# EAGLE board panel (EAGLE 6.3)
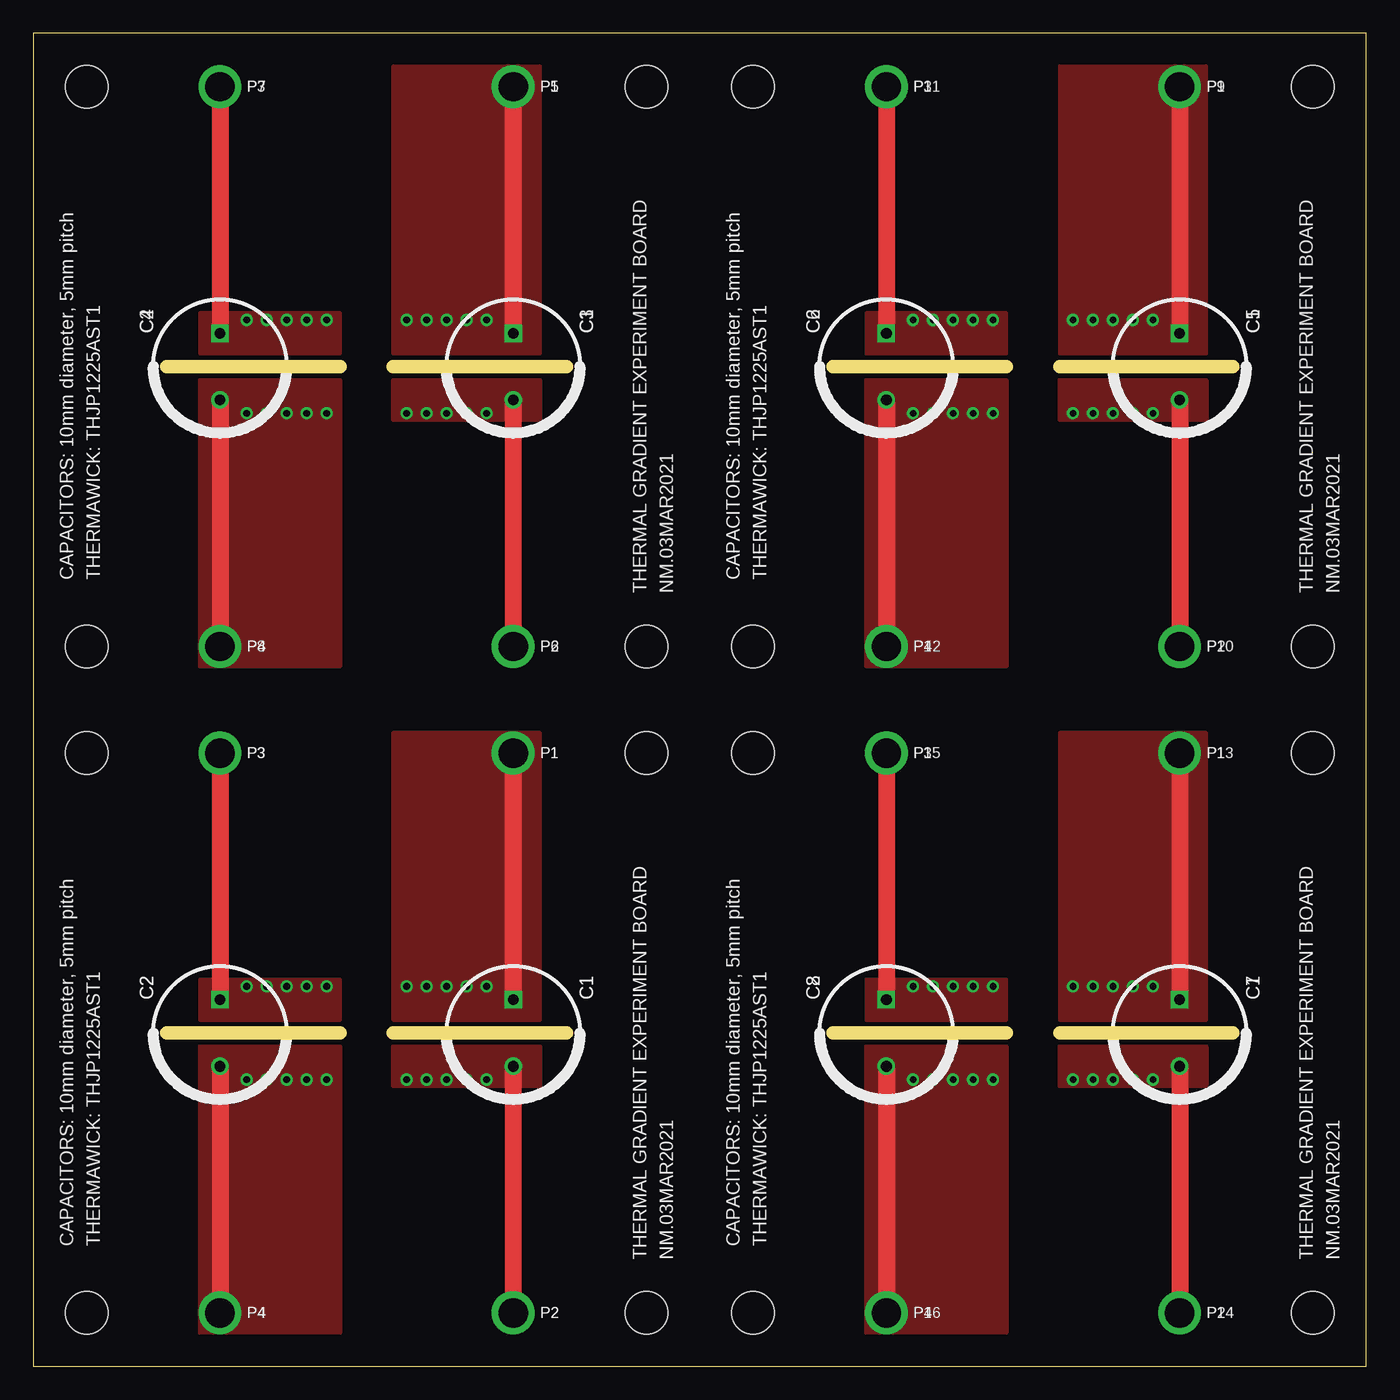
[diagram p0: board, top side]
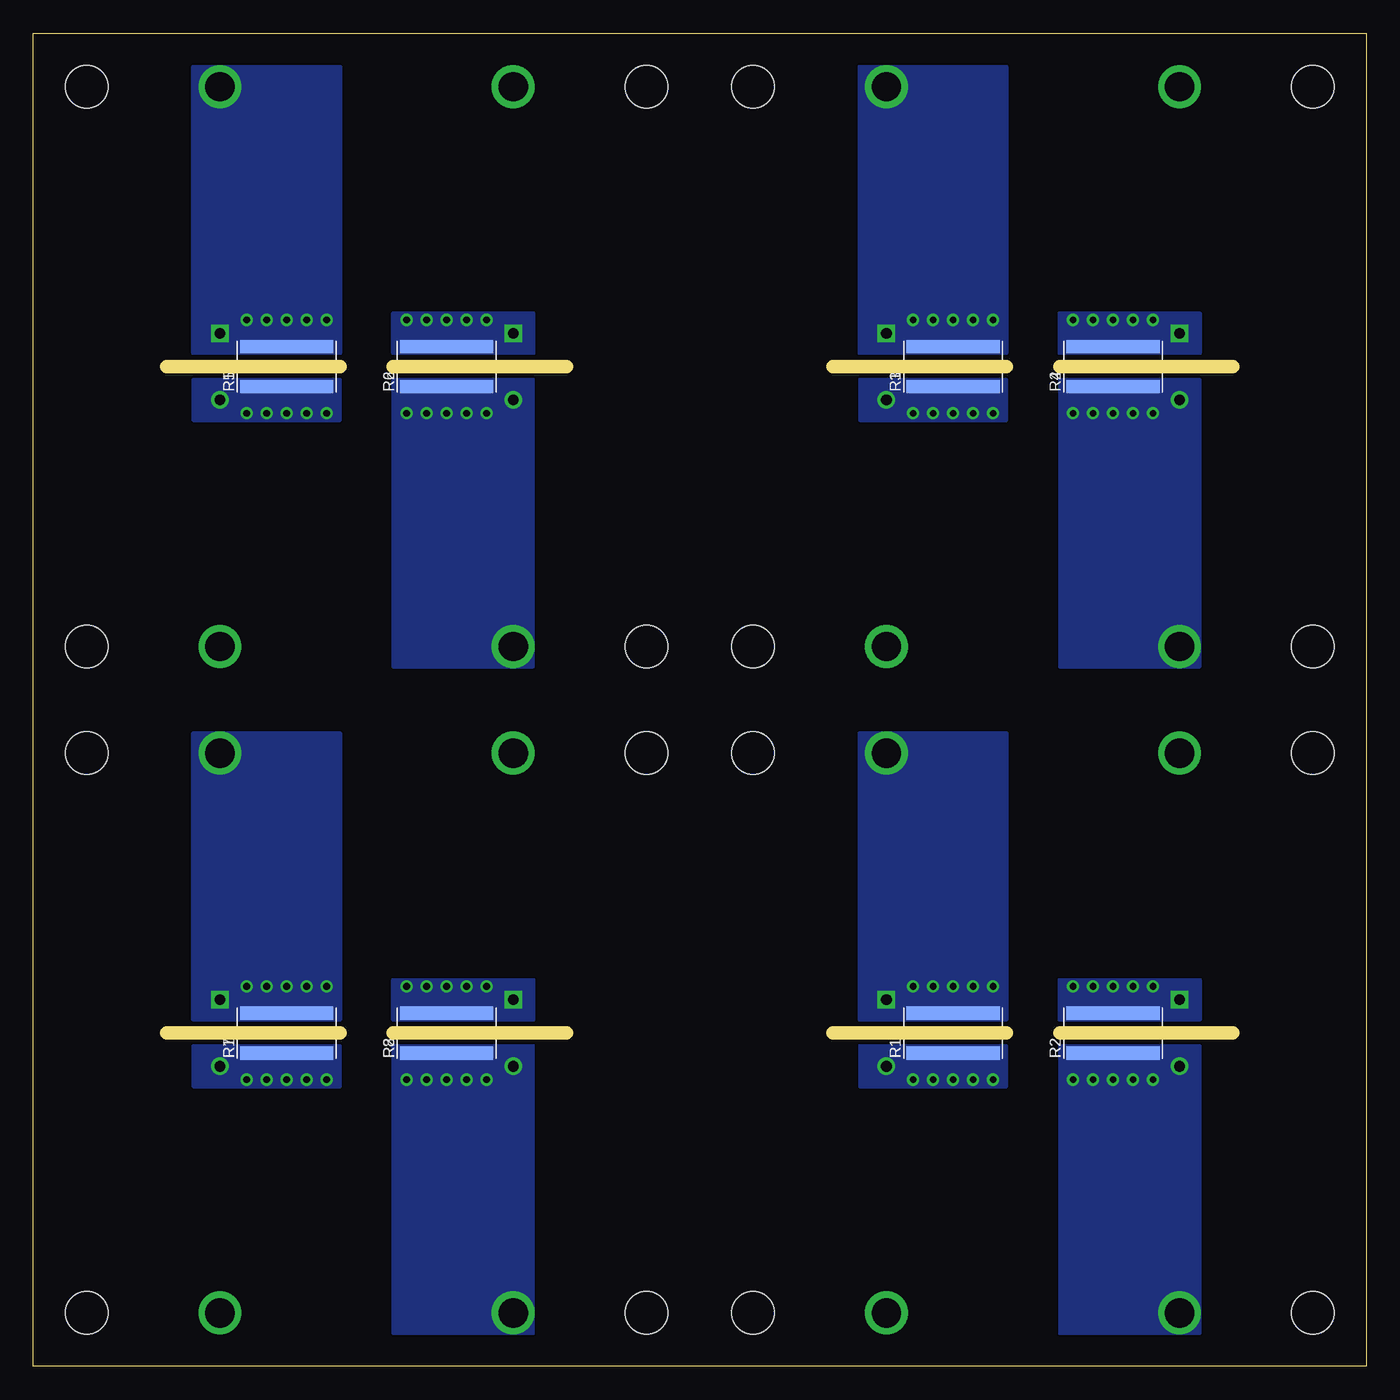
[diagram p1: board, bottom side, seen from below]

Size 100 x 100 mm. Coordinates in mm from the lower left corner, seen from the top.
Outline: 0,0 100,0 100,100 0,100 0,0
Copper layers (1*16): Top 0.035mm / dielectric 1.5mm / Bottom 0.035mm
Design rules "default *": minimum track width 10mil, minimum drill 24mil, track to track 8mil, track to pad 8mil, pad to pad 8mil, via to via 8mil, smd to smd 8mil, copper to edge 40mil, drill to drill 8mil, minimum pad ring 10mil, minimum via ring 8mil, stop-mask expansion 4mil, vias tented up to drill 20mil, thermal gap 10mil
Holes 3.2 mm at 4,46 46,4 4,4 46,46 4,96 46,54 4,54 46,96 54,96 96,54 54,54 96,96 54,46 96,4 54,4 96,46
Milling: 8 lines

## Footprints (pad centres in the part's own frame; a part is rotated, then mirrored left to right if it is on the bottom)
C_PZF_10 = drill 0.8 square: 1+ 2.5,0 | drill 0.8: 2- -2.5,0
PINS_1_2MM2 = drill 2.2: 1 0,0
R_THERMAL_1225 = smd 1 x 7: 1 -1.5,0; 2 1.5,0

## Placement (x,y rotation side)
C1  C-EU_10X5  [C_PZF_10]  36,25 90 top
C2  C-EU_10X5  [C_PZF_10]  14,25 90 top
C3  C-EU_10X5  [C_PZF_10]  36,75 90 top
C4  C-EU_10X5  [C_PZF_10]  14,75 90 top
C5  C-EU_10X5  [C_PZF_10]  86,75 90 top
C6  C-EU_10X5  [C_PZF_10]  64,75 90 top
C7  C-EU_10X5  [C_PZF_10]  86,25 90 top
C8  C-EU_10X5  [C_PZF_10]  64,25 90 top
P1  [PINS_1_2MM2]  36,46 0 top
P2  [PINS_1_2MM2]  36,4 0 top
P3  [PINS_1_2MM2]  14,46 0 top
P4  [PINS_1_2MM2]  14,4 0 top
P5  [PINS_1_2MM2]  36,96 0 top
P6  [PINS_1_2MM2]  36,54 0 top
P7  [PINS_1_2MM2]  14,96 0 top
P8  [PINS_1_2MM2]  14,54 0 top
P9  [PINS_1_2MM2]  86,96 0 top
P10  [PINS_1_2MM2]  86,54 0 top
P11  [PINS_1_2MM2]  64,96 0 top
P12  [PINS_1_2MM2]  64,54 0 top
P13  [PINS_1_2MM2]  86,46 0 top
P14  [PINS_1_2MM2]  86,4 0 top
P15  [PINS_1_2MM2]  64,46 0 top
P16  [PINS_1_2MM2]  64,4 0 top
R1  [R_THERMAL_1225]  31,25 90 bottom
R2  [R_THERMAL_1225]  19,25 90 bottom
R3  [R_THERMAL_1225]  31,75 90 bottom
R4  [R_THERMAL_1225]  19,75 90 bottom
R5  [R_THERMAL_1225]  81,75 90 bottom
R6  [R_THERMAL_1225]  69,75 90 bottom
R7  [R_THERMAL_1225]  81,25 90 bottom
R8  [R_THERMAL_1225]  69,25 90 bottom

## Library data of the parts
C1-C8 P1-P16 R1-R8 = nolan

## Nets
N$1: C1.1+ P1.1 R1.2
N$2: C1.2- P2.1 R1.1
N$3: C2.1+ P3.1 R2.2
N$4: C2.2- P4.1 R2.1
N$5: C3.1+ P5.1 R3.2
N$6: C3.2- P6.1 R3.1
N$7: C4.1+ P7.1 R4.2
N$8: C4.2- P8.1 R4.1
N$9: C5.1+ P9.1 R5.2
N$10: C5.2- P10.1 R5.1
N$11: C6.1+ P11.1 R6.2
N$12: C6.2- P12.1 R6.1
N$13: C7.1+ P13.1 R7.2
N$14: C7.2- P14.1 R7.1
N$15: C8.1+ P15.1 R8.2
N$16: C8.2- P16.1 R8.1

## Tracks (layer width: path | path; a pad name or v marks a point on that pad's centre or on a via)
N$1  (via drill 0.5)
  Top 1.27: P1.1 C1.1+
  other vias: 28,28.5 29.5,28.5 31,28.5 32.5,28.5 34,28.5
  pour Bottom (no thermals): 27,26 38,26 38,47.5 27,47.5
  pour Top (no thermals): 27,26 38,26 38,47.5 27,47.5
N$2  (via drill 0.5)
  Top 1.27: C1.2- P2.1
  other vias: 28,21.5 29.5,21.5 31,21.5 32.5,21.5 34,21.5
  pour Bottom (no thermals): 27,24 38,24 38,21 27,21
  pour Top (no thermals): 27,24 38,24 38,21 27,21
N$3  (via drill 0.5)
  Top 1.27: P3.1 C2.1+
  other vias: 16,28.5 17.5,28.5 19,28.5 20.5,28.5 22,28.5
  pour Bottom (no thermals): 12.5,26 23,26 23,29 12.5,29
  pour Top (no thermals): 12.5,26 23,26 23,29 12.5,29
N$4  (via drill 0.5)
  Top 1.27: C2.2- P4.1
  other vias: 16,21.5 17.5,21.5 19,21.5 20.5,21.5 22,21.5
  pour Top (no thermals): 12.5,24 23,24 23,2.5 12.5,2.5
  pour Bottom (no thermals): 12.5,24 23,24 23,2.5 12.5,2.5
N$5  (via drill 0.5)
  Top 1.27: P5.1 C3.1+
  other vias: 28,78.5 29.5,78.5 31,78.5 32.5,78.5 34,78.5
  pour Bottom (no thermals): 27,76 38,76 38,97.5 27,97.5
  pour Top (no thermals): 27,76 38,76 38,97.5 27,97.5
N$6  (via drill 0.5)
  Top 1.27: C3.2- P6.1
  other vias: 28,71.5 29.5,71.5 31,71.5 32.5,71.5 34,71.5
  pour Bottom (no thermals): 27,74 38,74 38,71 27,71
  pour Top (no thermals): 27,74 38,74 38,71 27,71
N$7  (via drill 0.5)
  Top 1.27: P7.1 C4.1+
  other vias: 16,78.5 17.5,78.5 19,78.5 20.5,78.5 22,78.5
  pour Bottom (no thermals): 12.5,76 23,76 23,79 12.5,79
  pour Top (no thermals): 12.5,76 23,76 23,79 12.5,79
N$8  (via drill 0.5)
  Top 1.27: C4.2- P8.1
  other vias: 16,71.5 17.5,71.5 19,71.5 20.5,71.5 22,71.5
  pour Top (no thermals): 12.5,74 23,74 23,52.5 12.5,52.5
  pour Bottom (no thermals): 12.5,74 23,74 23,52.5 12.5,52.5
N$9  (via drill 0.5)
  Top 1.27: P9.1 C5.1+
  other vias: 78,78.5 79.5,78.5 81,78.5 82.5,78.5 84,78.5
  pour Bottom (no thermals): 77,76 88,76 88,97.5 77,97.5
  pour Top (no thermals): 77,76 88,76 88,97.5 77,97.5
N$10  (via drill 0.5)
  Top 1.27: C5.2- P10.1
  other vias: 78,71.5 79.5,71.5 81,71.5 82.5,71.5 84,71.5
  pour Bottom (no thermals): 77,74 88,74 88,71 77,71
  pour Top (no thermals): 77,74 88,74 88,71 77,71
N$11  (via drill 0.5)
  Top 1.27: P11.1 C6.1+
  other vias: 66,78.5 67.5,78.5 69,78.5 70.5,78.5 72,78.5
  pour Bottom (no thermals): 62.5,76 73,76 73,79 62.5,79
  pour Top (no thermals): 62.5,76 73,76 73,79 62.5,79
N$12  (via drill 0.5)
  Top 1.27: C6.2- P12.1
  other vias: 66,71.5 67.5,71.5 69,71.5 70.5,71.5 72,71.5
  pour Top (no thermals): 62.5,74 73,74 73,52.5 62.5,52.5
  pour Bottom (no thermals): 62.5,74 73,74 73,52.5 62.5,52.5
N$13  (via drill 0.5)
  Top 1.27: P13.1 C7.1+
  other vias: 78,28.5 79.5,28.5 81,28.5 82.5,28.5 84,28.5
  pour Bottom (no thermals): 77,26 88,26 88,47.5 77,47.5
  pour Top (no thermals): 77,26 88,26 88,47.5 77,47.5
N$14  (via drill 0.5)
  Top 1.27: C7.2- P14.1
  other vias: 78,21.5 79.5,21.5 81,21.5 82.5,21.5 84,21.5
  pour Bottom (no thermals): 77,24 88,24 88,21 77,21
  pour Top (no thermals): 77,24 88,24 88,21 77,21
N$15  (via drill 0.5)
  Top 1.27: P15.1 C8.1+
  other vias: 66,28.5 67.5,28.5 69,28.5 70.5,28.5 72,28.5
  pour Bottom (no thermals): 62.5,26 73,26 73,29 62.5,29
  pour Top (no thermals): 62.5,26 73,26 73,29 62.5,29
N$16  (via drill 0.5)
  Top 1.27: C8.2- P16.1
  other vias: 66,21.5 67.5,21.5 69,21.5 70.5,21.5 72,21.5
  pour Top (no thermals): 62.5,24 73,24 73,2.5 62.5,2.5
  pour Bottom (no thermals): 62.5,24 73,24 73,2.5 62.5,2.5

## Text on the board
tPlace: CAPACITORS: 10mm diameter, 5mm pitch | THERMAWICK: THJP1225AST1 | CAPACITORS: 10mm diameter, 5mm pitch | THERMAWICK: THJP1225AST1 | THERMAL GRADIENT EXPERIMENT BOARD | NM.03MAR2021 | THERMAL GRADIENT EXPERIMENT BOARD | NM.03MAR2021 | CAPACITORS: 10mm diameter, 5mm pitch | THERMAWICK: THJP1225AST1 | CAPACITORS: 10mm diameter, 5mm pitch | THERMAWICK: THJP1225AST1 | THERMAL GRADIENT EXPERIMENT BOARD | NM.03MAR2021 | THERMAL GRADIENT EXPERIMENT BOARD | NM.03MAR2021
_tNames: P3 | P1 | P3 | P1 | C2 | C1 | C2 | C1 | P4 | P2 | P4 | P2 | P3 | P1 | P3 | P1 | C2 | C1 | C2 | C1 | P4 | P2 | P4 | P2
_bNames: R2 | R1 | R2 | R1 | R2 | R1 | R2 | R1